# Altium PCB PCB1_brd2.PcbDoc
Units mil, origin at the board's own origin, x right, y up, seen from the top; angles counter-clockwise.
Board outline 3900 x 3900 mil, 2 copper layers (Top Layer, Bottom Layer); 45 components, 28 nets, 144 pads, 0 vias.
Unrouted connection lines stored in the file: 115.
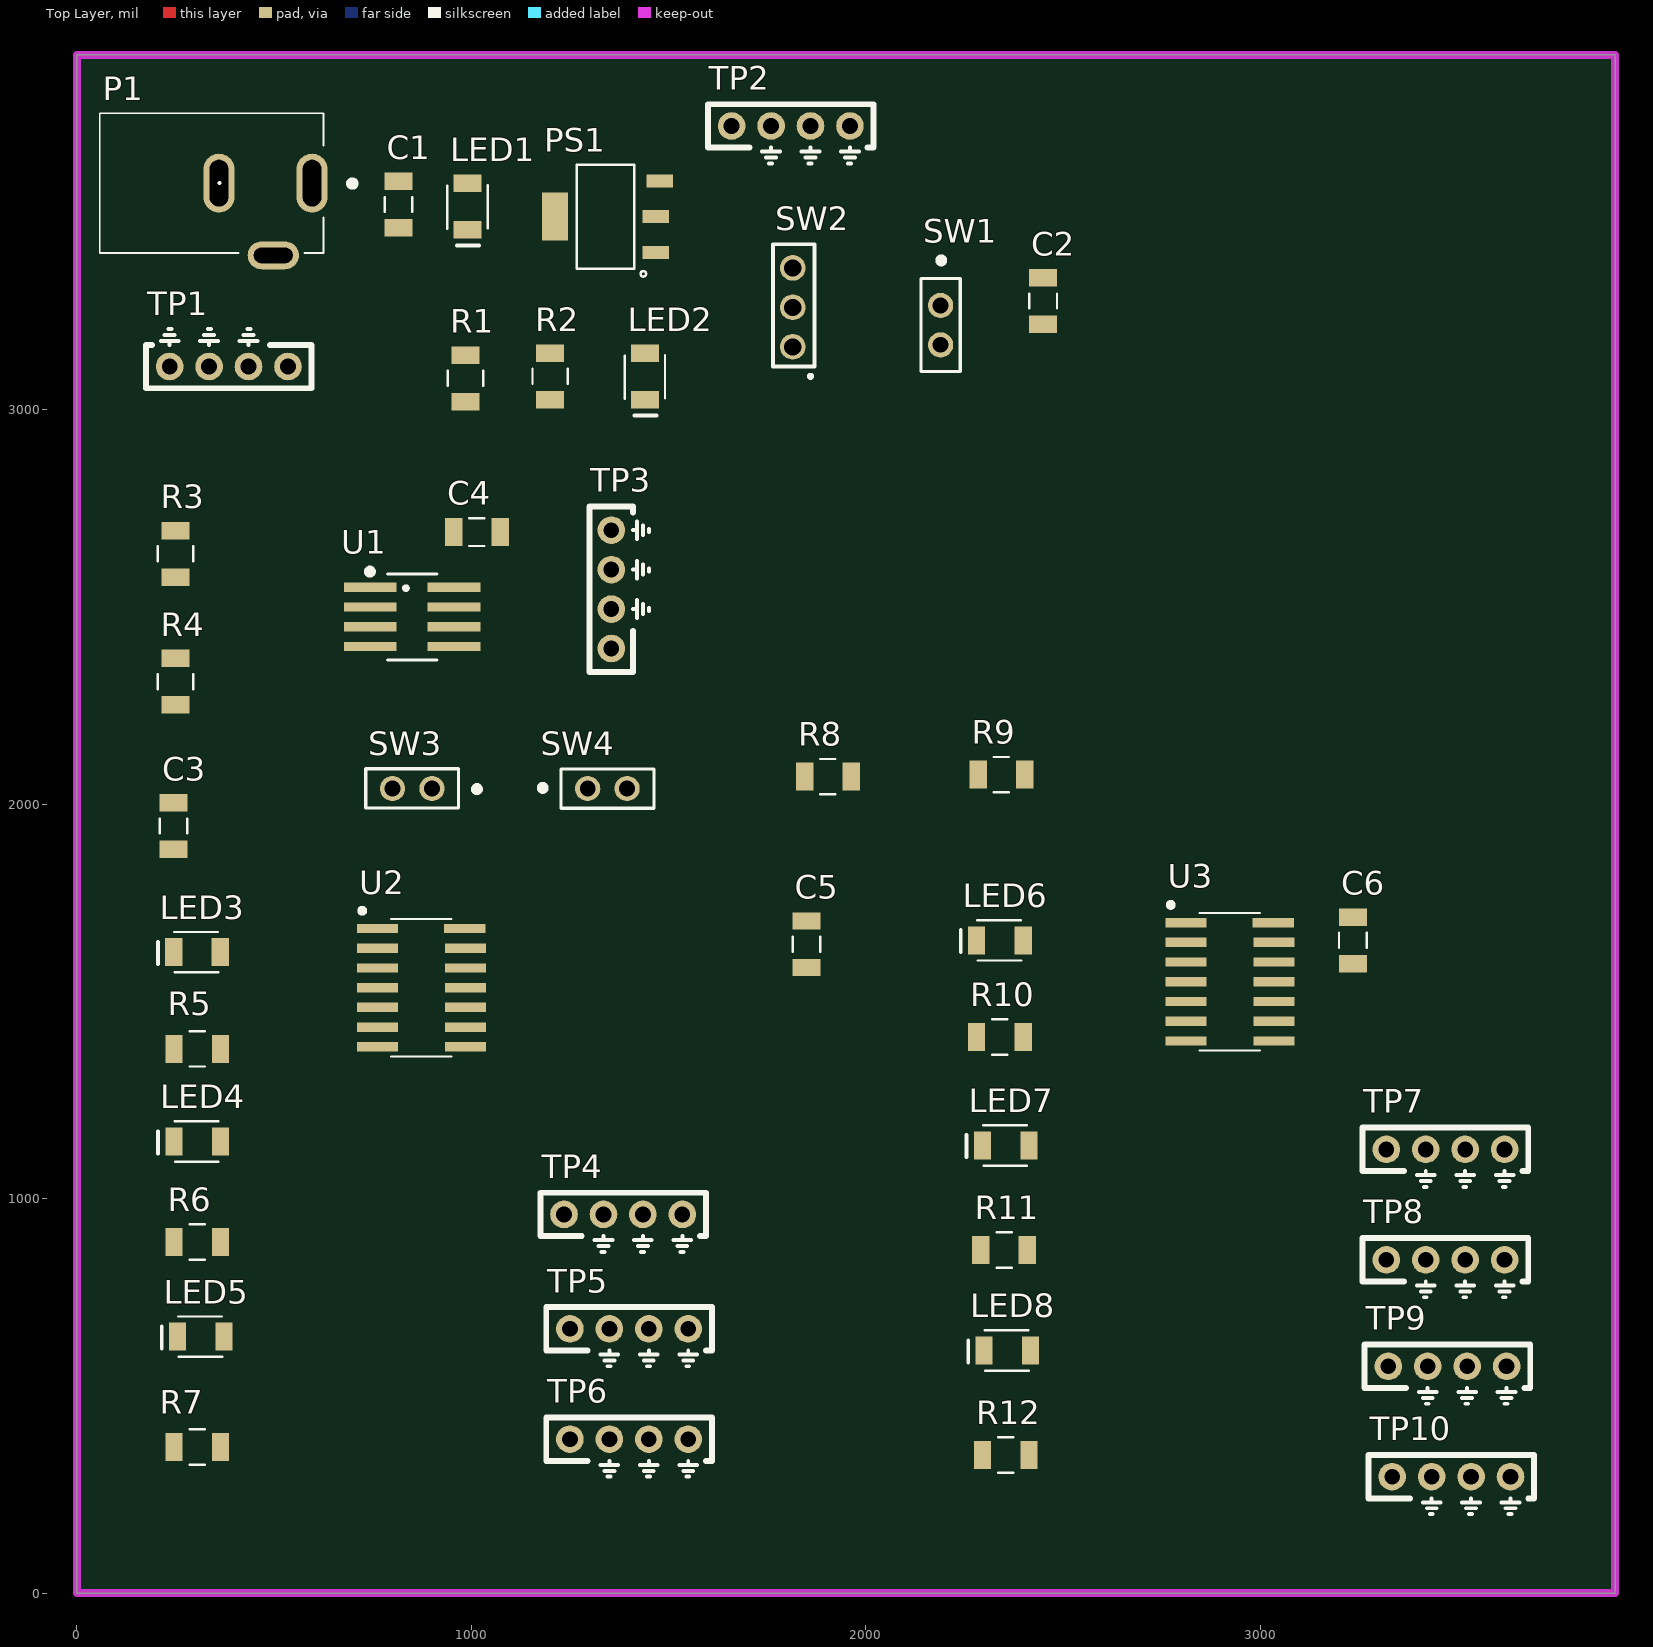
[diagram p0: Top Layer view]
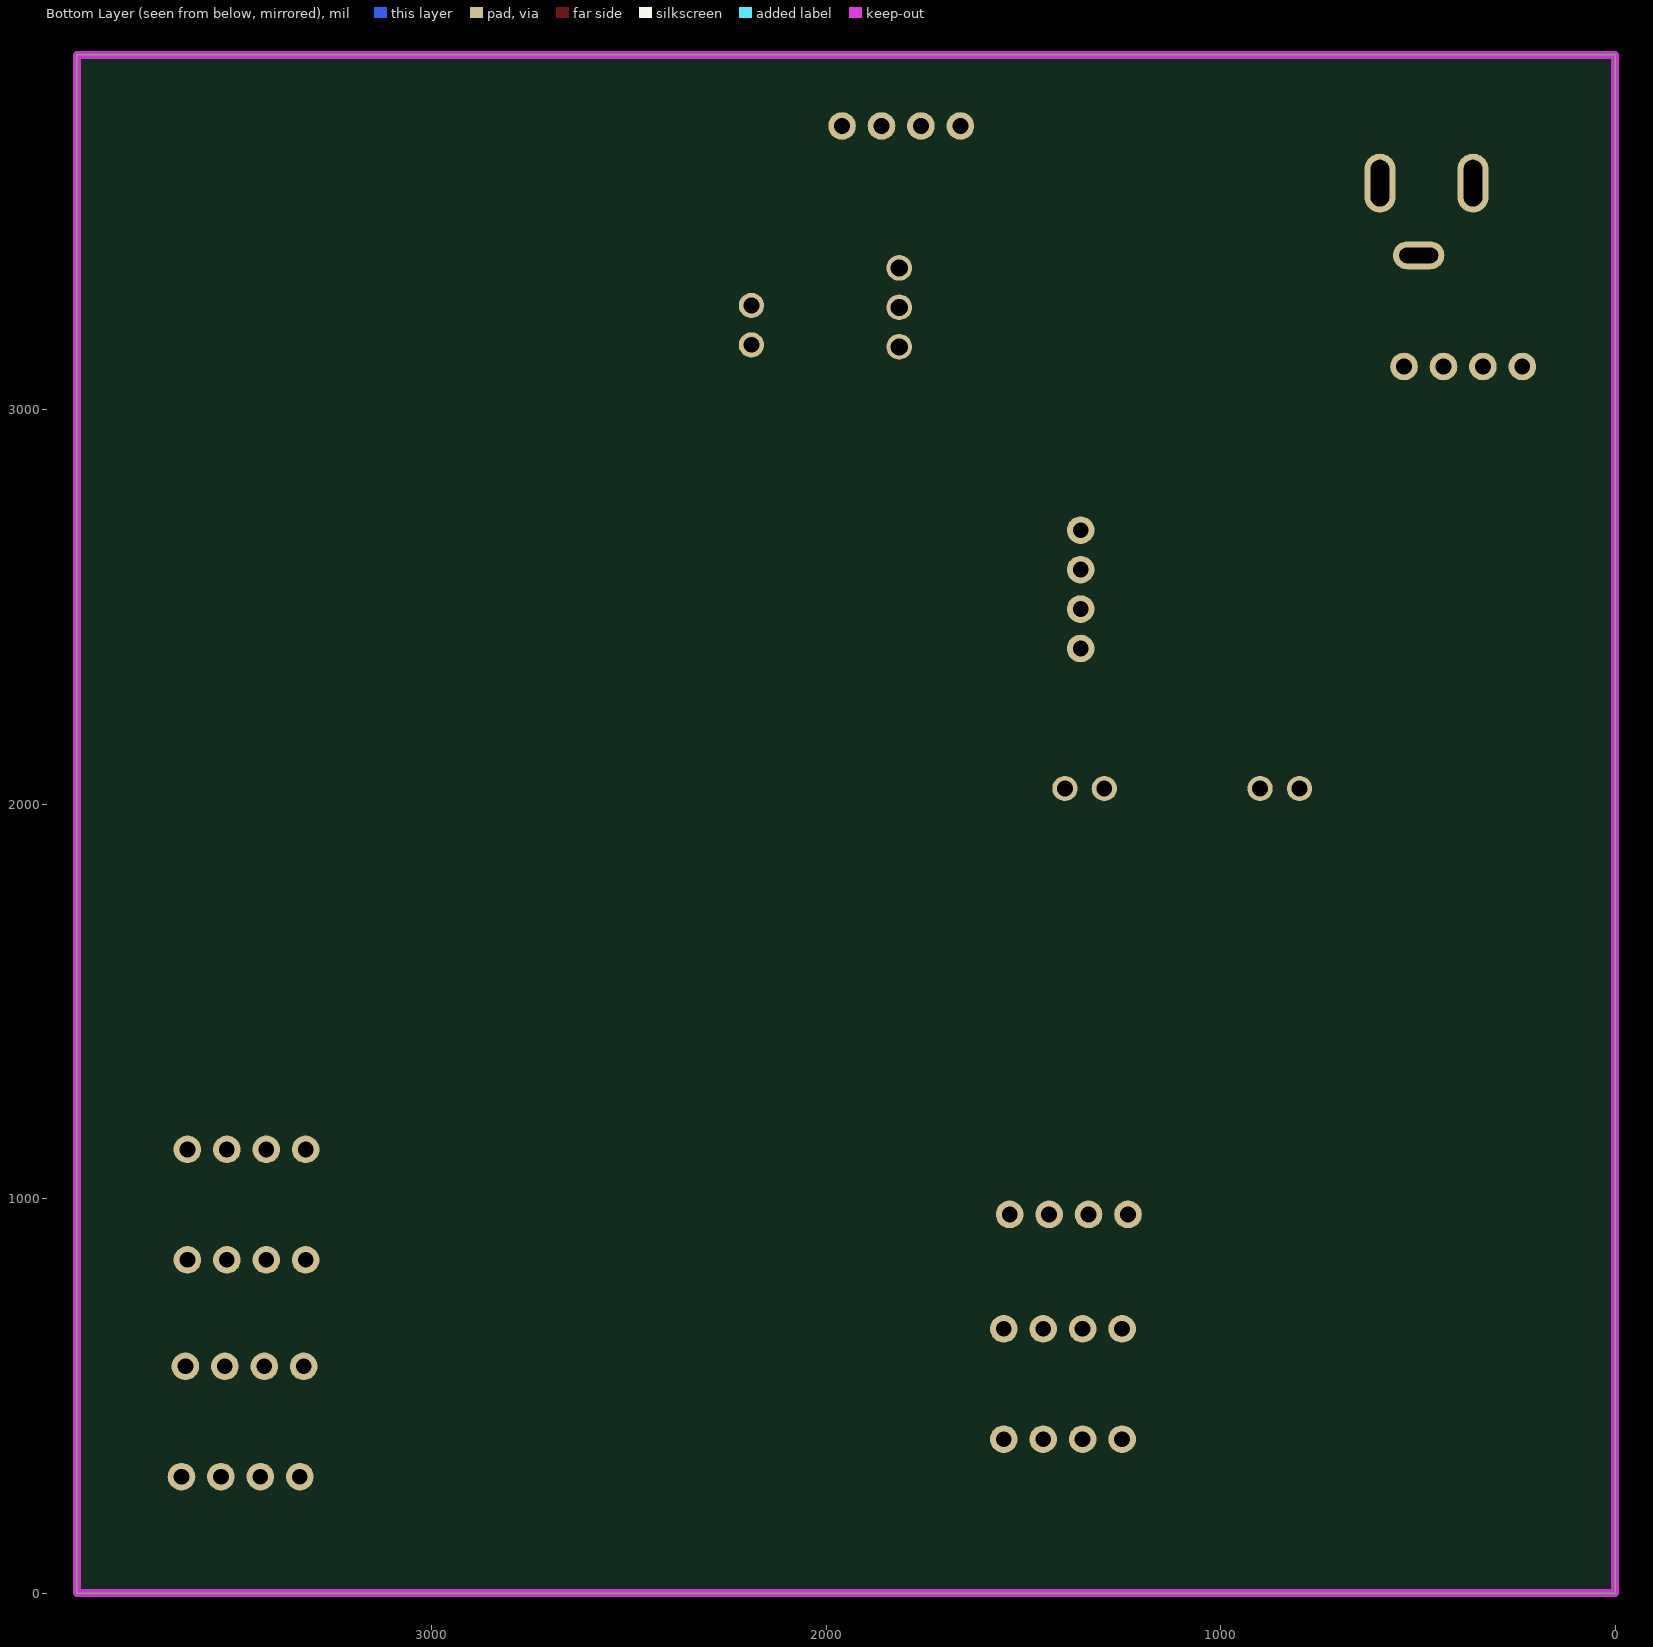
[diagram p1: Bottom Layer view, seen from below]

## Layer stack, top to bottom
Top Solder: solder mask 0.4, Solder Resist, Dk 3.5
Top Layer: signal copper 1.4
Dielectric 1: dielectric 12.6, FR-4, Dk 4.8
Bottom Layer: signal copper 1.4
Bottom Solder: solder mask 0.4, Solder Resist, Dk 3.5

## Board outline
0,0 3900,0 3900,3900 0,3900

## Design rules (kind name [scope] priority, off if disabled: settings)
BoardOutlineClearance [All] p1: gap=10 ignorepadtopadclearanceinfootprint=FALSE except(0: Arc-SplitContinuation Track-SplitContinuation SMDPad-SplitContinuation THPad-SplitContinuation Via-SplitContinuation Fill-SplitContinuation Poly-SplitContinuation Region-SplitContinuation Text-SplitContinuation)
Clearance [All] p1: gap=10 ignorepadtopadclearanceinfootprint=FALSE
PlaneClearance [All] p1: clearance=10
PlaneConnect [All] p1: planeconnectstyle=Direct reliefexpansion=20 reliefentries=4 reliefconductorwidth=10 reliefairgap=10
PolygonConnect [All] p1: thpad.connectstyle=Relief thpad.reliefconductorwidth=10 thpad.reliefentries=4 thpad.polygonreliefangle="90 Angle" thpad.airgapwidth=10 smdpad.connectstyle=Direct smdpad.reliefconductorwidth=10 smdpad.reliefentries=4 smdpad.polygonreliefangle="90 Angle" smdpad.airgapwidth=10 via.connectstyle=Direct via.reliefconductorwidth=10 via.reliefentries=4 via.polygonreliefangle="90 Angle" via.airgapwidth=10
RoutingVias [All] p1: holewidth=13 width=25 viastyle="Through Hole" minholewidth=13 minwidth=25 maxholewidth=16 maxwidth=80
SolderMaskExpansion [All] p1: expansion=4 istentingtop=FALSE
SupplyNets "Schematic Supply Nets_1" [InNet('5A')] p1: voltage=0.000
SupplyNets "Schematic Supply Nets" [InNet('3.3V')] p2: voltage=0.000
Width "Schematic Width Constraint_1" [InNet('NetC1_2')] p1: maxlimit=100 minlimit=10 preferedwidth=20 minimp=50.000000 maximp=50.000000 favimp=50.000000
Width "Schematic Width Constraint" [InNet('3.3V')] p2: maxlimit=100 minlimit=10 preferedwidth=20 minimp=50.000000 maximp=50.000000 favimp=50.000000
Width [All] p3: maxlimit=100 minlimit=6 preferedwidth=6 minimp=50.000000 maximp=50.000000 favimp=50.000000
28 further rules are at their usual default settings.

## Components (designator, comment, footprint, x,y, rotation, side; value= is the part's Value field where it differs from the comment)
C1 "22uF" 1206_Passive_Capacitor 815,3521 r90 top
C2 "22uF" 1206_Passive_Capacitor 2450,3276 r270 top
C3 "1uF" 1206_Passive_Capacitor 245,1945 r90 top
C4 "22uF" 1206_Passive_Capacitor 1014,2690 r0 top
C5 "22uF" 1206_Passive_Capacitor 1850,1645 r270 top
C6 "22uF" 1206_Passive_Capacitor 3235,1655 r270 top
LED1 "Green" LED_1206 990,3516 r270 top
LED2 "Blue" LED_1206 1440,3085 r270 top
LED3 "Green" LED_1206 304,1625 r180 top
LED4 "Green" LED_1206 305,1145 r180 top
LED5 "Green" LED_1206 314,650 r180 top
LED6 "Green" LED_1206 2340,1655 r180 top
LED7 "Green" LED_1206 2355,1135 r180 top
LED8 "Green" LED_1206 2359,615 r180 top
P1 "Power Jack" Power_Jack 596.22,3575 r180 top value="CONN PWR JACK 2X5.5MM SOLDER"
PS1 "AMS1117-3.3" LDO 1340,3490 r90 top value="IC REG LINEAR 3.3V 800MA SOT223"
R1 "1k" 1206_Passive_Resitor 985,3080 r90 top value="1K Ohm"
R2 "1k" 1206_Passive_Resitor 1200,3085 r270 top value="1K Ohm"
R3 "1k" 1206_Passive_Resitor 250,2635 r90 top value="1K Ohm"
R4 "1k" 1206_Passive_Resitor 250,2311 r90 top value="1K Ohm"
R5 "47 Ohms" 1206_Passive_Resitor 305,1380 r0 top value=47Ohm
R6 "47 Ohms" 1206_Passive_Resitor 305,890 r0 top value=47Ohm
R7 "47 Ohms" 1206_Passive_Resitor 305,370 r0 top value=47Ohm
R8 "10k" 1206_Passive_Resitor 1904,2070 r0 top value=10KOhm
R9 "10k" 1206_Passive_Resitor 2344,2075 r0 top value=10KOhm
R10 "47 Ohms" 1206_Passive_Resitor 2340,1410 r0 top value=47Ohm
R11 "47 Ohms" 1206_Passive_Resitor 2351,870 r0 top value=47Ohm
R12 "47 Ohms" 1206_Passive_Resitor 2355,350 r0 top value=47Ohm
SW1 "SW_2Pin_100mil_Switch" 2Pin-Header-Conn 2190,3265 r270 top
SW2 "PREC003SAAN-RC" 3_PIN_100mil 1815,3160 r90 top value="CONN HEADER VERT 3POS 2.54MM"
SW3 "SW_2Pin_100mil_Switch" 2Pin-Header-Conn 900,2040 r180 top
SW4 "SW_2Pin_100mil_Switch" 2Pin-Header-Conn 1295,2040 r0 top
TP1 "TP_5V" TP10x_Probe 385,3110 r180 top
TP2 "10x Probe TP" TP10x_Probe 1810,3720 r0 top
TP3 "10x Probe TP" TP10x_Probe 1355,2545 r90 top
TP4 "10x Probe TP" TP10x_Probe 1385,960 r0 top
TP5 "10x Probe TP" TP10x_Probe 1400,670 r0 top
TP6 "10x Probe TP" TP10x_Probe 1400,390 r0 top
TP7 "10x Probe TP" TP10x_Probe 3470,1125 r0 top
TP8 "10x Probe TP" TP10x_Probe 3470,845 r0 top
TP9 "10x Probe TP" TP10x_Probe 3475,575 r0 top
TP10 "10x Probe TP" TP10x_Probe 3485,295 r0 top
U1 "LMC555CMX/NOPB" TS555IDTTR 850,2475 r0 top
U2 "SN74AHC14DR" HEX_74AC14 873.35,1535 r0 top
U3 "SN74AHC14DR" HEX_74AC14 2923.35,1550 r0 top

## Footprints (in the part's own frame and the unit in brackets; to place one, negate y for a bottom-side part, rotate by r counter-clockwise, add the part's x,y. Pads: shape width x height; smd on the part's side, far side on the other; paste and mask are expansions set on the pad)
2Pin-Header-Conn [mm]
  round 1.62 hole 1.02: 1(0,0) 2(2.54,0)
  silkscreen extent -3.03,-1.27 4.26,1.26, body extent -1.27,-1.27 3.81,1.27, height 8.13
3_PIN_100mil [mm]
  round 1.65 hole 1.1: 1(0,0) 2(2.54,0) 3(5.08,0)
  silkscreen extent -2,-1.4 6.6,1.27, body extent -1.14,-1.27 6.48,1.27, height 8.38
1206_Passive_Capacitor [mil]
  rect 44x71 smd: 1(-59,0) 2(59,0)
  silkscreen extent -19,-35 19,35, body extent -63,-31 63,32, height 50
1206_Passive_Resitor [mil]
  rect 44x71 smd: 1(-59,0) 2(59,0)
  silkscreen extent -19,-45 19,45, body extent -61,-31 61,31, height 26
HEX_74AC14 [mm]
  rect 2.65x0.6 smd: 1(-2.836,3.81) 2(-2.836,2.54) 3(-2.836,1.27) 4(-2.836,0) 5(-2.836,-1.27) 6(-2.836,-2.54) 7(-2.836,-3.81) 8(2.836,-3.81) 9(2.836,-2.54) 10(2.836,-1.27) 11(2.836,0) 12(2.836,1.27) 13(2.836,2.54) 14(2.794,3.81)
  silkscreen extent -3.94,-4.43 1.95,5.08, body extent -3.18,-4.35 2.82,4.3, height 1.75
LDO [mm]
  rect 0.838x1.7 smd: 1(-2.311,-3.25) 2(0,-3.25) 3(2.311,-3.5)
  rect 3.099x1.7 smd: 4(0,3.25)
  silkscreen extent -3.86,-2.62 3.35,1.85, body extent -3.25,-3.65 3.25,3.35, height 1.85
LED_1206 [mil]
  rect 44x71 smd: 1(-59,0) 2(59,0)
  silkscreen extent -54,-51 99,51, body extent -63,-31 63,31, height 28
Power_Jack [mm]
  oval 2x3.8 hole 1.2 slot 3 at 90 deg: 1(0,0) 2(6,0)
  oval 3.3x1.8 hole 1 slot 2.5 at 0 deg: 3(2.5,4.65)
  silkscreen extent -2.79,-4.5 13.68,4.5, body extent -0.76,-4.45 13.64,4.95, height 11.49
TP10x_Probe [mil] "Small Probs footprint"
  round 70 hole 40: 1(-150,0) 2(-50,0) 2(50,0) 2(150,0)
  silkscreen extent -210,-95 210,55
TS555IDTTR [mm] "IC OSC Single Timer 2.7MHz 8SOIC"
  rect 3.4x0.6 smd: 1(-2.7,1.905) 2(-2.7,0.635) 3(-2.7,-0.635) 4(-2.7,-1.905) 5(2.7,-1.905) 6(2.7,-0.635) 7(2.7,0.635) 8(2.7,1.905)
  silkscreen extent -2.85,-2.77 1.6,3.05, body extent -3.03,-2.48 2.96,2.43, height 1.75

## Part data
C1 C2 C4 C5 C6: library part C_22uF_1206, "22uF ±10% 25V X5R 1206 Multilayer Ceramic Capacitors MLCC - SMD/SMT RoHS", LCSC Part#=C12891, MFR Part #=CL31A226KAHNNNE, Datasheet=https://datasheet.lcsc.com/lcsc/1811031514_Samsung-Electro-Mechanics-CL31A226KAHNNNE_C12891.pdf, Type=basic
C3: library part C_1uF_1206, "MULTILAYER CERAMIC CAPACITORS MLCC - SMD/SMT 1UF 50V 1206 ROHS", LCSC Part#=C1848, MFR Part #=CL31B105KBHNNNE, Digikey Link=https://www.digikey.com/product-detail/en/C1206C105M4RACTU/399-8150-1-ND/3471873/?itemSeq=304982366, Type=Basic
LED1 LED3 LED4 LED5 LED6 LED7 LED8: library part LED_GREEN_1206, "Green 513~528nm 1206 Light Emitting Diodes (LED) RoHS", LCSC Part#=C434439, MFR Part #=SZYY1206G, Datasheet=https://datasheet.lcsc.com/lcsc/2006301532_Yongyu-Photoelectric-SZYY1206G_C434439.pdf, Type=Extended
LED2: library part LED_BLUE_1206, "blue 1206  Light Emitting Diodes (LED) ROHS", LCSC Part#=C130717, MFR Part #=NCD1206B1, Datasheet=https://datasheet.lcsc.com/lcsc/2008201033_Foshan-NationStar-Optoelectronics-NCD1206B1_C130717.pdf, Type=Extended
P1: library part "P_Power Jack", "Power Barrel Connector Jack 2.10mm ID (0.083\"), 5.50mm OD (0.217\") Through Hole, Right Angle", LCSC Part#=C136744, MFR Part #=PJ-102A, Digikey Link=https://www.digikey.com/product-detail/en/PJ-102A/CP-102A-ND/275425/?itemSeq=304982367, Type=Extended
PS1: library part PS_AMS_LDO_3v3, "LOW DROPOUT REGULATORS(LDO) POSITIVE FIXED 1.3V @ 800MA 15V 3.3V 1A SOT-223 ROHS", LCSC Part#=C6186, MFR Part #=AMS1117-3.3, Type=Basic
R1 R2 R3 R4: library part R_1K_1206, "CHIP RESISTOR - SURFACE MOUNT 1KOHMS ±1% 1/4W 1206 ROHS", LCSC Part#=C4410, MFR Part #=RNCP1206FTD1K00CT, Digikey Link=https://www.digikey.com/product-detail/en/RNCP1206FTD1K00/RNCP1206FTD1K00CT-ND/2240675/?itemSeq=304982373, Type=Basic
R5 R6 R7 R10 R11 R12: library part R_47Ohm_1206, "47Ω ±5% 0.25W ±200ppm/℃ 1206 Chip Resistor - Surface Mount RoHS", LCSC Part#=C25384, MFR Part #=1206W4J0470T5E, Datasheet=https://datasheet.lcsc.com/lcsc/1811101020_UNI-ROYAL-Uniroyal-Elec-1206W4J0470T5E_C25384.pdf, Type=Extended
R8 R9: library part R_10KOhm_1206, "10 kOhms ±5% 0.25W, 1/4W Chip Resistor 1206 (3216 Metric) Automotive AEC-Q200 Thick Film", LCSC Part#=C17902, MFR Part #=RMCF1206FT10K0, Digikey Link=https://www.digikey.com/en/products/detail/stackpole-electronics-inc/RMCF1206FT10K0/1759669, Type=Basic
SW1 SW3 SW4: "2Pin Header", LCSC Part#=C124375, Type=Extended
SW2: library part SW_3Pin_100mil_Switch, "Connector Header Through Hole 3 position 0.100\" (2.54mm)", LCSC Part#=C49257, Digikey Link=https://www.digikey.com/product-detail/en/PREC003SAAN-RC/S1012EC-03-ND/2774851/?itemSeq=304982371, MFR Part #=PREC003SAAN-RC, Type=Extended
TP1 TP2 TP3 TP4 TP5 TP6 TP7 TP8 TP9 TP10: library part TP_10x_Probe, "Test Point 300 mil centers"
U1: library part U_555_Fast, "555 Type, Timer/Oscillator _Single_ IC 3MHz 8-SO", LCSC Part#=C90760, Package=SOIC-8, Digikey Link=https://www.digikey.com/product-detail/en/texas-instruments/LMC555CMX-NOPB/LMC555CMX-NOPBCT-ND/1010550, MFR Part #=LMC555CMX/NOPB, Type=Extended
U2 U3: library part U_74AHC14, "Inverter IC 6 Channel Schmitt Trigger 14-SOIC", LCSC Part#=C6942, Datasheet=https://datasheet.lcsc.com/szlcsc/ON-Semicon-ON-74AC14SCX_C5482.pdf, MFR Part #=SN74AHC14DR, Type=Extended

## Nets (pads, with @x,y where several pads share a name; then routed paths per layer and width w, separated by ;. In a path a pad name is that pad's centre, name@x,y a point inside that pad or via, vN(x,y) a via of type N, cw(c..) or ccw(c..) an arc to the next point about the centre after c; other vN are vias at no path point)
1A: R8.2 R9.1 SW3.2 SW4.2 U2.1 U2.3 U2.5 U2.9 U3.1 U3.3 U3.5 U3.9
3.3V: LED2.1 PS1.2 PS1.4 SW1.2 SW2.1 TP2.1
5A: C1.1 C2.1 C3.1 C4.2 C5.2 C6.2 P1.2 P1.3 PS1.1 R1.1 R2.1 R5.2 R6.2 R7.2 R10.2 R11.2 R12.2 TP1.2 TP2.2 TP3.2 TP4.2 TP5.2 TP6.2 TP7.2 TP8.2 TP9.2 TP10.2 U1.1 U2.7 U2.11 U3.7 U3.11
6A: C5.1 C6.1 R8.1 R9.2 SW2.2 U2.13 U2.14 U3.13 U3.14
NetC1_2: C1.2 C4.1 LED1.1 LED1.2 P1.1 PS1.3 R1.2 R3.2 SW2.3 TP1.1 U1.4 U1.8
NetC2_2: C2.2 SW1.1
NetC3_2: C3.2 R4.1 U1.2 U1.6
NetLED2_2: LED2.2 R2.2
NetLED3_1: LED3.1 U2.2
NetLED3_2: LED3.2 R5.1
NetLED4_1: LED4.1 U2.4
NetLED4_2: LED4.2 R6.1
NetLED5_1: LED5.1 U2.6
NetLED5_2: LED5.2 R7.1
NetLED6_1: LED6.1 U3.2
NetLED6_2: LED6.2 R10.1
NetLED7_1: LED7.1 U3.4
NetLED7_2: LED7.2 R11.1
NetLED8_1: LED8.1 U3.6
NetLED8_2: LED8.2 R12.1 TP10.1
NetR3_1: R3.1 R4.2 U1.7
NetSW3_1: SW3.1 SW4.1 TP3.1 U1.3
NetTP4_1: TP4.1 U2.8
NetTP5_1: TP5.1 U2.10
NetTP6_1: TP6.1 U2.12
NetTP7_1: TP7.1 U3.8
NetTP8_1: TP8.1 U3.10
NetTP9_1: TP9.1 U3.12
pads on no net: U1.5

## Keep-outs
Keep-Out Layer:
  the board outline again, w20